# EAGLE board PCB_AM (EAGLE 9.6.2)
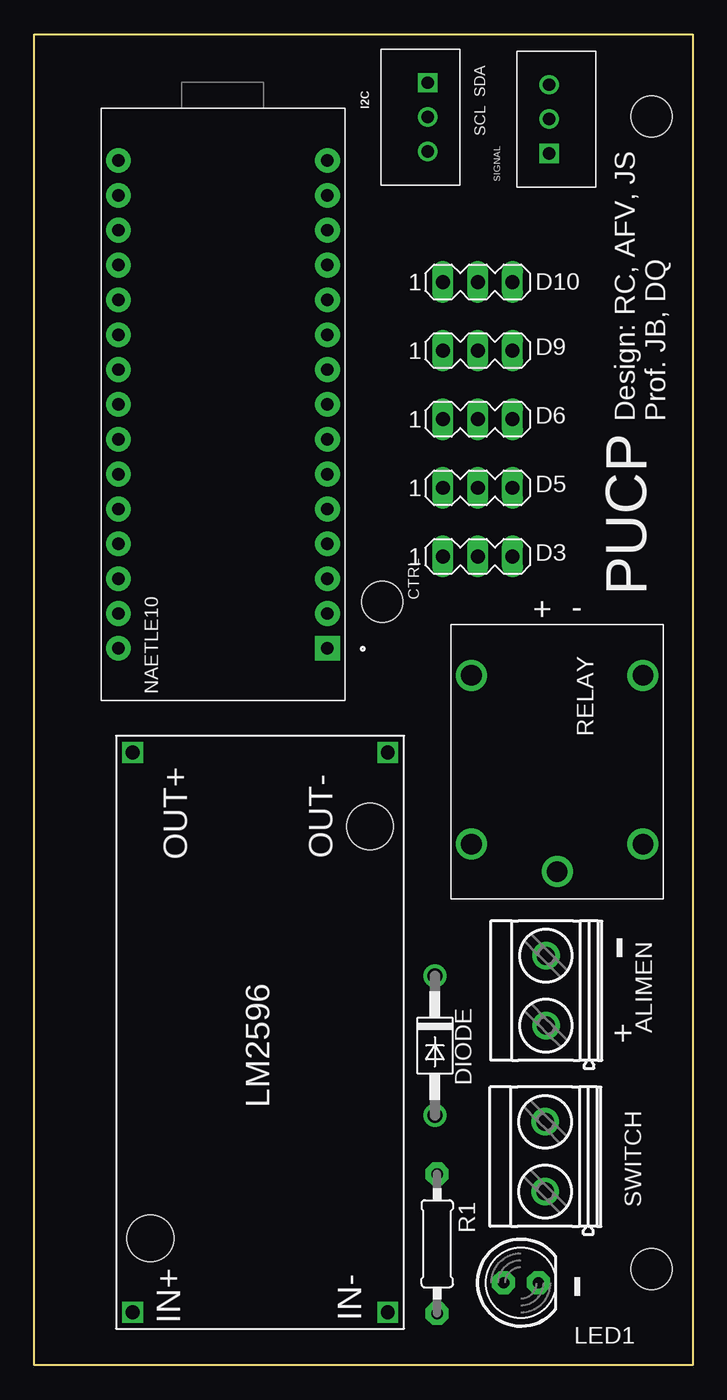
[diagram p0: board, top side]
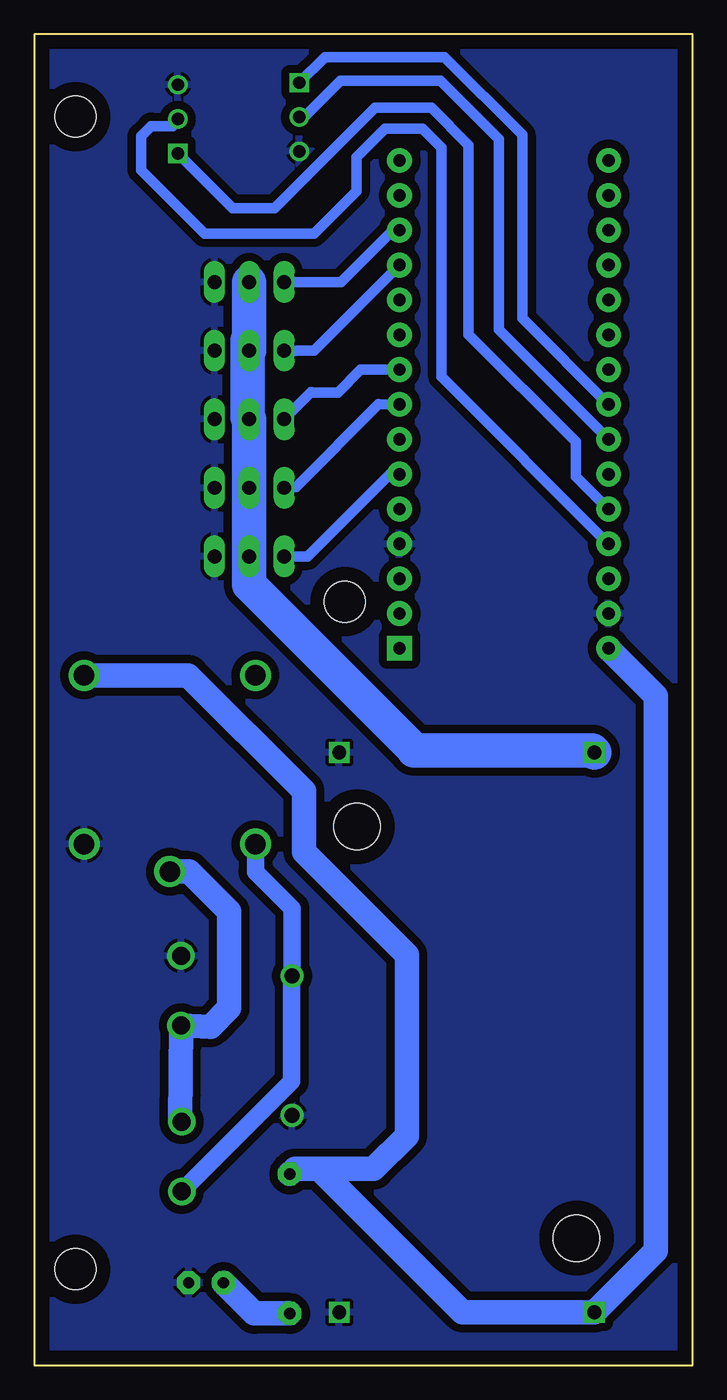
[diagram p1: board, bottom side, seen from below]

Size 48 x 97 mm. Coordinates in mm from the lower left corner, seen from the top.
Outline: 0,0 0,97 48,97 48,0 0,0
Copper layers (1*16): Top 0.035mm / dielectric 1.5mm / Bottom 0.035mm
Design rules "default *": minimum track width 6mil, minimum drill 0.35mm, track to track 6mil, track to pad 6mil, pad to pad 6mil, via to via 6mil, smd to smd 6mil, copper to edge 40mil, drill to drill 6mil, minimum pad ring 10mil, minimum via ring 8mil, stop-mask expansion 4mil, vias tented up to drill 0mil, thermal gap 10mil
Holes 3 mm at 45,91 25.36,55.64 45,7

## Footprints (pad centres in the part's own frame; a part is rotated, then mirrored left to right if it is on the bottom)
MKDSN1,5/2-5,08 = drill 1.3 pad 2: 1 -2.561,0.025; 2 2.519,0.025
MA03-1 = drill 1.016 long: 1 -2.54,0; 2 0,0; 3 2.54,0
DO41-10 = drill 1.118: A 5.08,0; C -5.08,0
B3B-XH-A = drill 0.9 square: 1 2.5,0 | drill 0.9: 2 0,0; 3 -2.5,0
LED5MM = drill 0.813 pad 1.676 octagon: A -1.27,0; K 1.27,0
0207/10 = drill 0.813 pad 1.676 octagon: 1 -5.08,0; 2 5.08,0
RELAY12V = drill 1.5: 1 16,-14; 2 16,-1.5; C 18,-7.75; NC 3.7,-14; NO 3.7,-1.5
SHIELD_ARDUINO_NANO = drill 0.9 pad 1.8 square: 1 -7.62,17.78 | drill 0.9 pad 1.8: 2 -7.62,15.24; 3 -7.62,12.7; 4 -7.62,10.16; 5 -7.62,7.62; 6 -7.62,5.08; 7 -7.62,2.54; 8 -7.62,0; 9 -7.62,-2.54; 10 -7.62,-5.08; 11 -7.62,-7.62; 12 -7.62,-10.16; 13 -7.62,-12.7; 14 -7.62,-15.24; 15 -7.62,-17.78; 16 7.62,-17.78; 17 7.62,-15.24; 18 7.62,-12.7; 19 7.62,-10.16; 20 7.62,-7.62; 21 7.62,-5.08; 22 7.62,-2.54; 23 7.62,0; 24 7.62,2.54; 25 7.62,5.08; 26 7.62,7.62; 27 7.62,10.16; 28 7.62,12.7; 29 7.62,15.24; 30 7.62,17.78
LM2596 = drill 1 square: IN+ 1.2,-1.2; IN- 1.2,-19.8; OUT+ 42,-1.2; OUT- 42,-19.8 | hole 3.4: 6.6,-2.5; 36.6,-18.5

## Placement (x,y rotation side)
ALIMEN  MKDSN1,5/2-5,08  [MKDSN1,5/2-5,08]  37.33,27.32 90 top
D3  [MA03-1]  32.33,58.95 0 top
D5  [MA03-1]  32.33,63.95 0 top
D6  [MA03-1]  32.33,68.95 0 top
D9  [MA03-1]  32.33,73.95 0 top
D10  [MA03-1]  32.33,78.95 0 top
DIODE  1N4004  [DO41-10]  29.21,23.29 270 top
I2C  JST-XH-3  [B3B-XH-A]  28.68,90.97 90 top
LED1  [LED5MM]  35.49,6.01 0 top
R1  [0207/10]  29.37,8.85 270 top
RELAY  [RELAY12V]  45.87,53.98 270 top
SWITCH  MKDSN1,5/2-5,08  [MKDSN1,5/2-5,08]  37.27,15.22 90 top
TB1  ARDUINO_NANO  [SHIELD_ARDUINO_NANO]  13.75,70.02 180 top
U$1  LM2596  [LM2596]  5.97,2.66 90 top
US  JST-XH-3  [B3B-XH-A]  37.54,90.82 270 top

## Library data of the parts
ALIMEN SWITCH = con-phoenix-508
D3 D5 D6 D9 D10 = con-lstb; OC_FARNELL: unknown; OC_NEWARK: unknown
DIODE = diode
I2C US = con-JST-XH; MF: JST; MPN: B3B-XH-A
LED1 R1 = adafruit
RELAY = ModularRobot
TB1 = ARDUINO_NANO; AVAILABILITY: Not in stock; CHECK_PRICES: https://www.snapeda.com/parts/Arduino%20Nano/Arduino/view-part/?ref=eda; DESCRIPTION: Small, complete, and breadboard-friendly board based on the ATmega328 (Arduino Nano 3.x); MF: Arduino; MP: Arduino Nano; PACKAGE: Non-Standard Arduino; PRICE: None; SNAPEDA_LINK: https://www.snapeda.com/parts/Arduino%20Nano/Arduino/view-part/?ref=snap
U$1 = LM2596

## Nets
3V3: TB1.17
5V: TB1.27 US.2
6V: D3.2 D5.2 D6.2 D9.2 D10.2 U$1.OUT+
AREF: TB1.18
GND: ALIMEN.2 D3.3 D5.3 D6.3 D9.3 D10.3 DIODE.A I2C.3 LED1.K RELAY.2 TB1.4 TB1.29 U$1.IN- U$1.OUT- US.3
N$1: LED1.A R1.2
SCL: I2C.2 TB1.24
SDA: I2C.1 TB1.23
SERVO1: D3.1 TB1.6
SERVO2: D5.1 TB1.8
SERVO3: D6.1 TB1.9
SERVO4: D9.1 TB1.12
SERVO5: D10.1 TB1.13
SIGNAL: TB1.26 US.1
VIN: ALIMEN.1 RELAY.C SWITCH.2
VIN2: R1.1 RELAY.NO TB1.30 U$1.IN+
VSWITCH: DIODE.C RELAY.1 SWITCH.1

## Tracks (layer width: path | path; a pad name or v marks a point on that pad's centre or on a via)
5V
  Bottom 0.762: TB1.27 18.3,72.03 18.3,88.72 19.71,90.12 22.43,90.12 24.51,88.04 24.51,85.58 27.62,82.47 35.59,82.47 40.22,87.1 40.22,89.58 39.49,90.31 37.91,90.31 37.48,90.74 37.48,90.77 US.2 37.69,90.67
6V
  Bottom 2.5: D10.2 D9.2 32.33,74.59 32.44,74.7 32.44,69.06 D6.2 D5.2 D3.2 32.33,56.89 20.31,44.87 20.31,44.82 20.31,44.81 7.31,44.81 U$1.OUT+
GND
  pour Bottom (isolate 0.61): -0.28,99.46 50.52,99.46 50.52,-0.85 1.57,-0.85 -0.28,1
N$1
  Bottom 1.778: R1.2 31.97,3.77 LED1.A
SCL
  Bottom 0.762: I2C.2 28.33,90.97 25.68,93.61 18.39,93.61 14.12,89.34 14.12,75.47 TB1.24
SDA
  Bottom 0.762: 6.13,70.07 TB1.23 12.41,76.31 12.41,89.67 18.09,95.34 26.8,95.34 I2C.1
SERVO1
  Bottom 0.762: D3.1 28.07,58.95 22.08,64.94 TB1.6
SERVO2
  Bottom 0.762: D5.1 29.79,64.01 28.93,64.01 22.89,70.05 TB1.8
SERVO3
  Bottom 0.762: D6.1 27.81,70.92 27.8,70.89 25.87,70.89 24.2,72.56 TB1.9
SERVO4
  Bottom 0.762: TB1.12 27.62,73.93 29.01,73.93 29.04,73.9 D9.1
SERVO5
  Bottom 0.762: D10.1 25.62,78.95 21.84,82.72 TB1.13
SIGNAL
  Bottom 0.762: TB1.26 8.51,64.78 8.51,67.3 16.33,75.12 16.33,88.91 19.05,91.64 23.16,91.64 30.47,84.32 33.53,84.32 US.1
VIN
  Bottom 1.778: SWITCH.2 37.36,17.85 ALIMEN.1 35.16,24.68 33.78,26.05 33.78,33.06 36.7,35.98 RELAY.C
VIN2
  Bottom 1.778: TB1.30 2.68,48.79 2.68,8.35 U$1.IN+ 16.78,3.86 27.23,14.31 | R1.1 29,14.31 27.23,14.31 | RELAY.NO 36.77,50.28 28.35,41.85 28.35,37.41 20.84,29.9 20.84,16.72 23.25,14.31 27.23,14.31
VSWITCH
  Bottom 1.27: RELAY.1 31.87,35.97 29.21,33.3 DIODE.C 29.23,28.35 29.23,20.68 SWITCH.1

## Text on the board
tPlace: +
tNames: SDA | SCL | SIGNAL | Design: RC, AFV, JS / Prof. JB, DQ | CTRL | PUCP | - | NAETLE10 | - | + | -